# Altium PCB IDC_SMA_Adapter.PCBDOC
Units mm, origin at the board's own origin, x right, y up, seen from the top; angles counter-clockwise.
Board outline 55.81 x 100.04 mm, 4 copper layers (TopLayer, Internal Plane 2, Signal Layer 1, BottomLayer), stack 1.563 mm thick; 71 components, 53 nets, 206 pads, 38 vias.
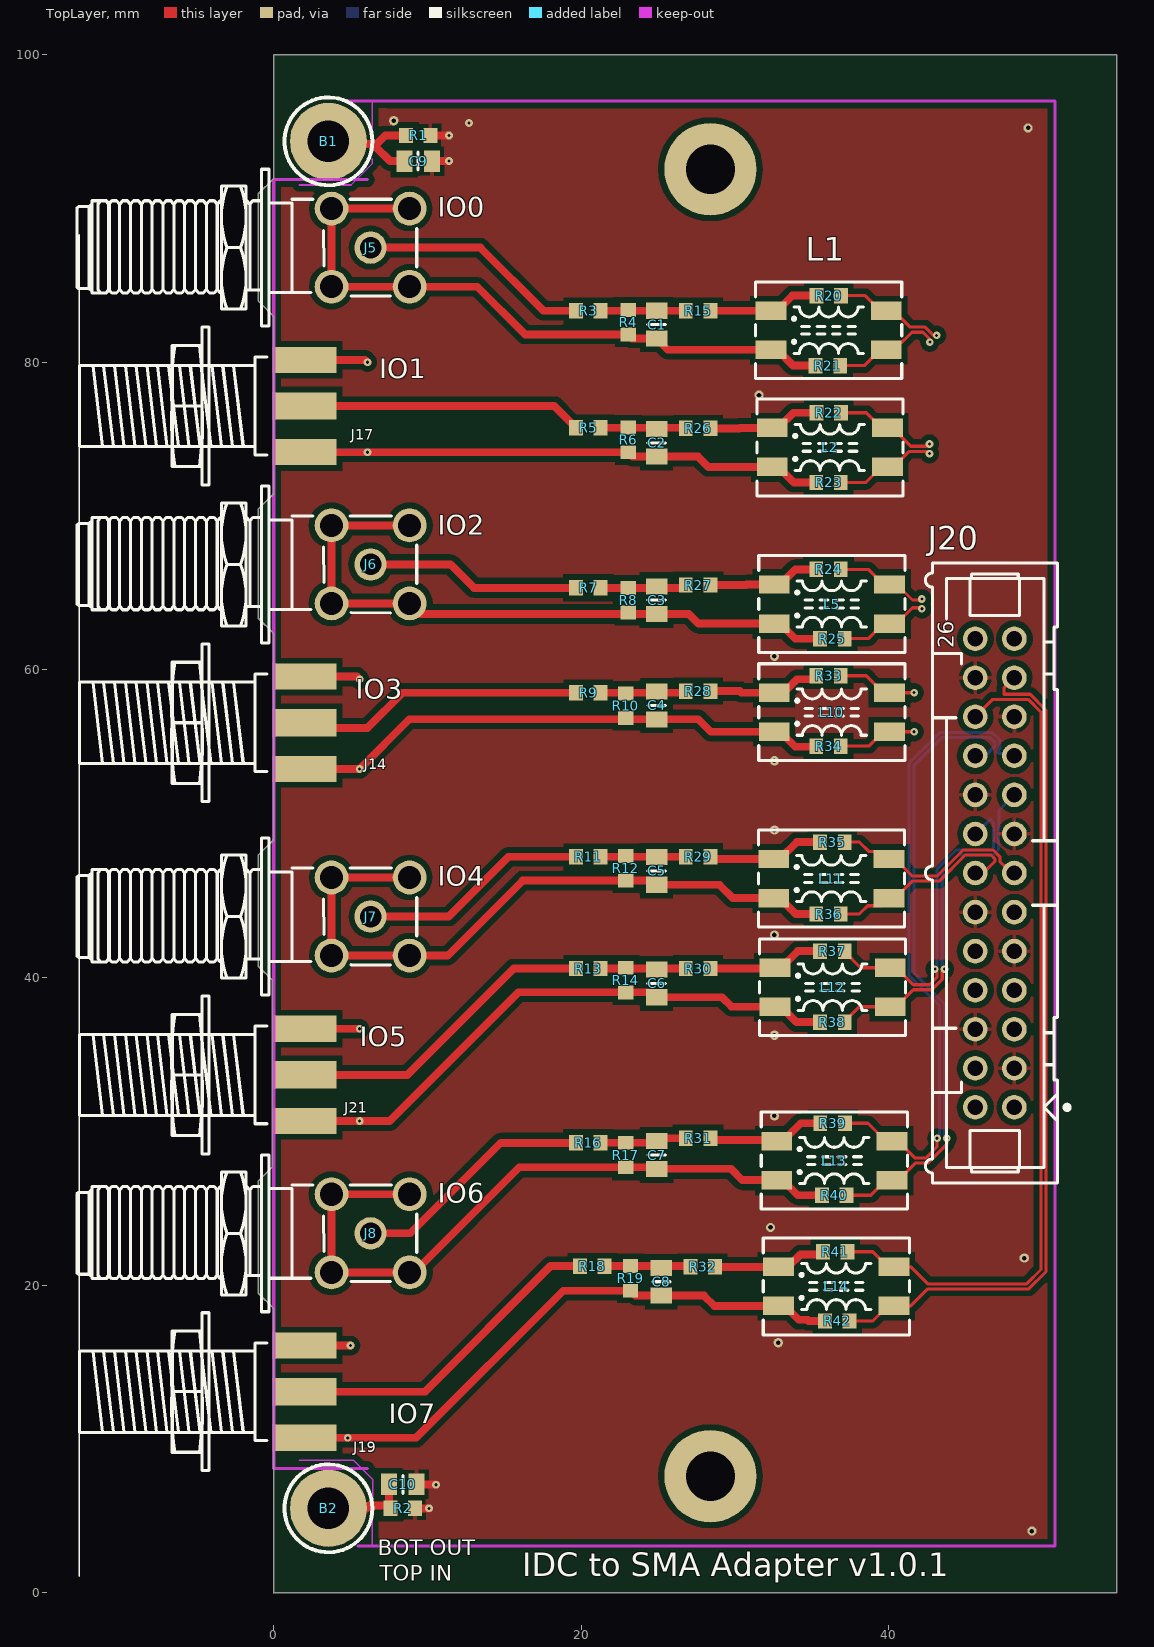
[diagram p0: TopLayer view]
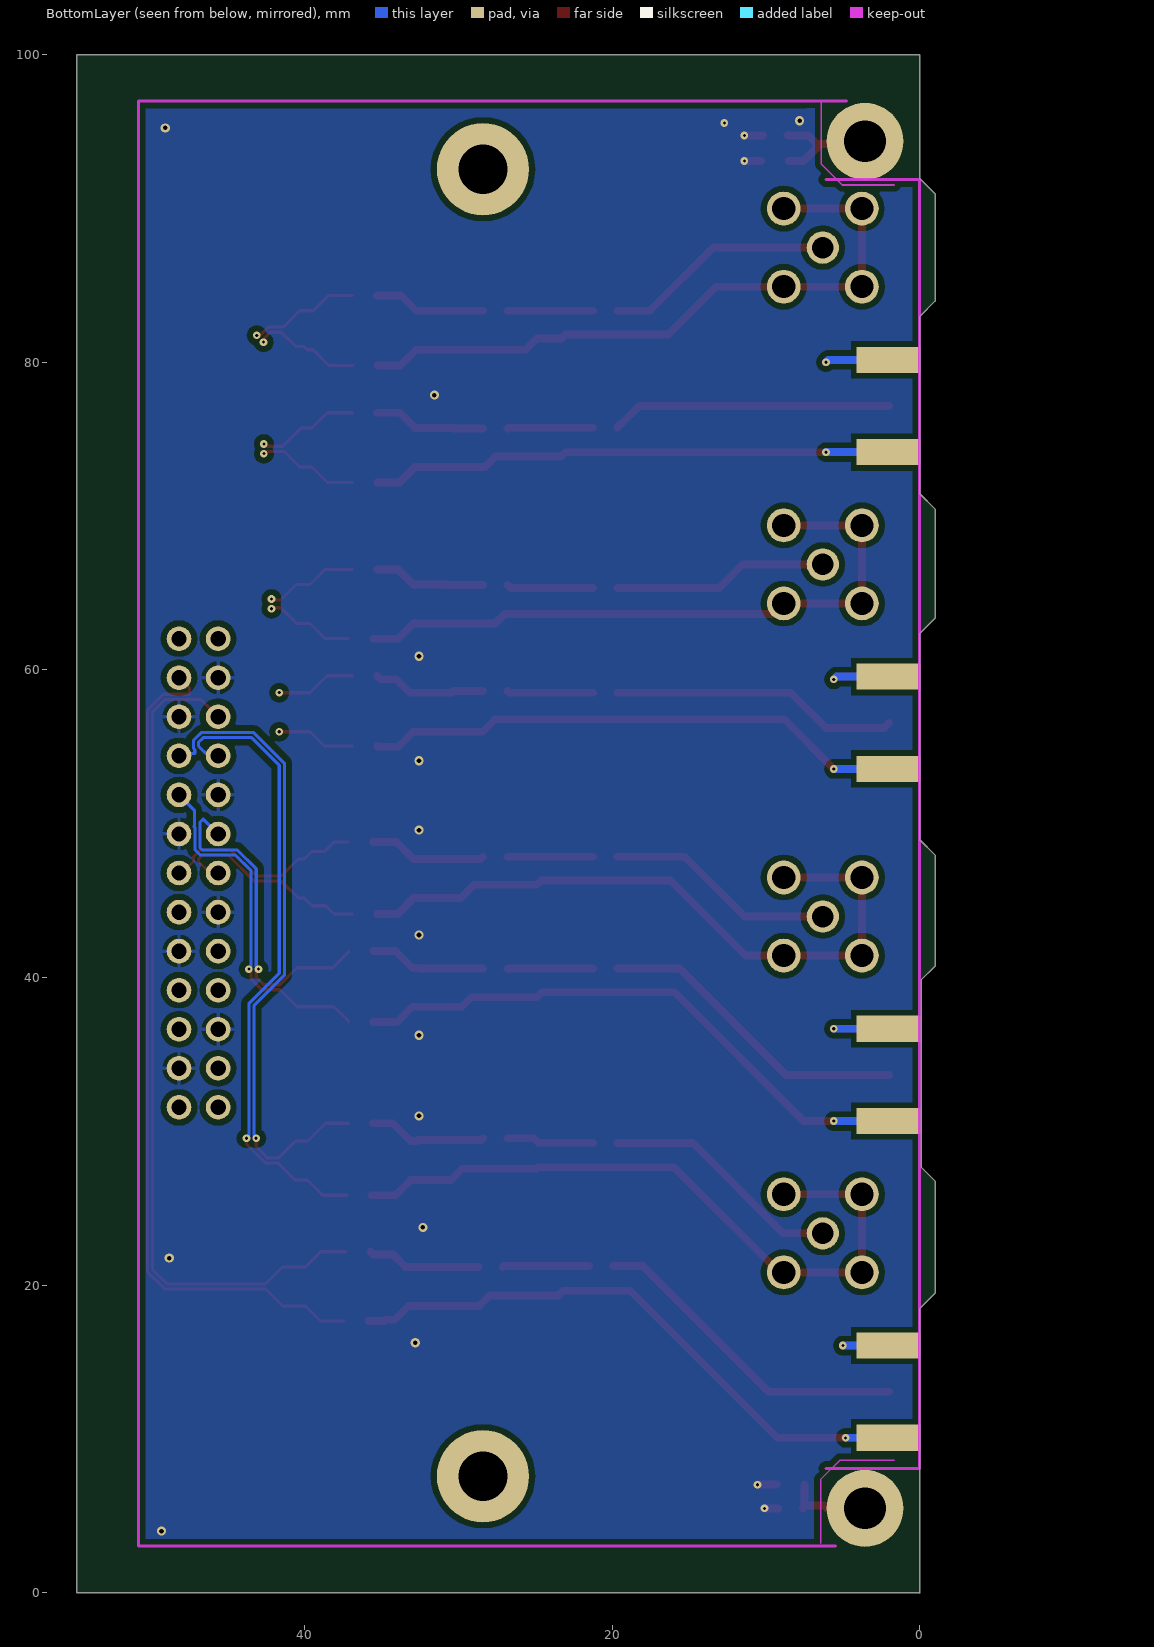
[diagram p1: BottomLayer view, seen from below]
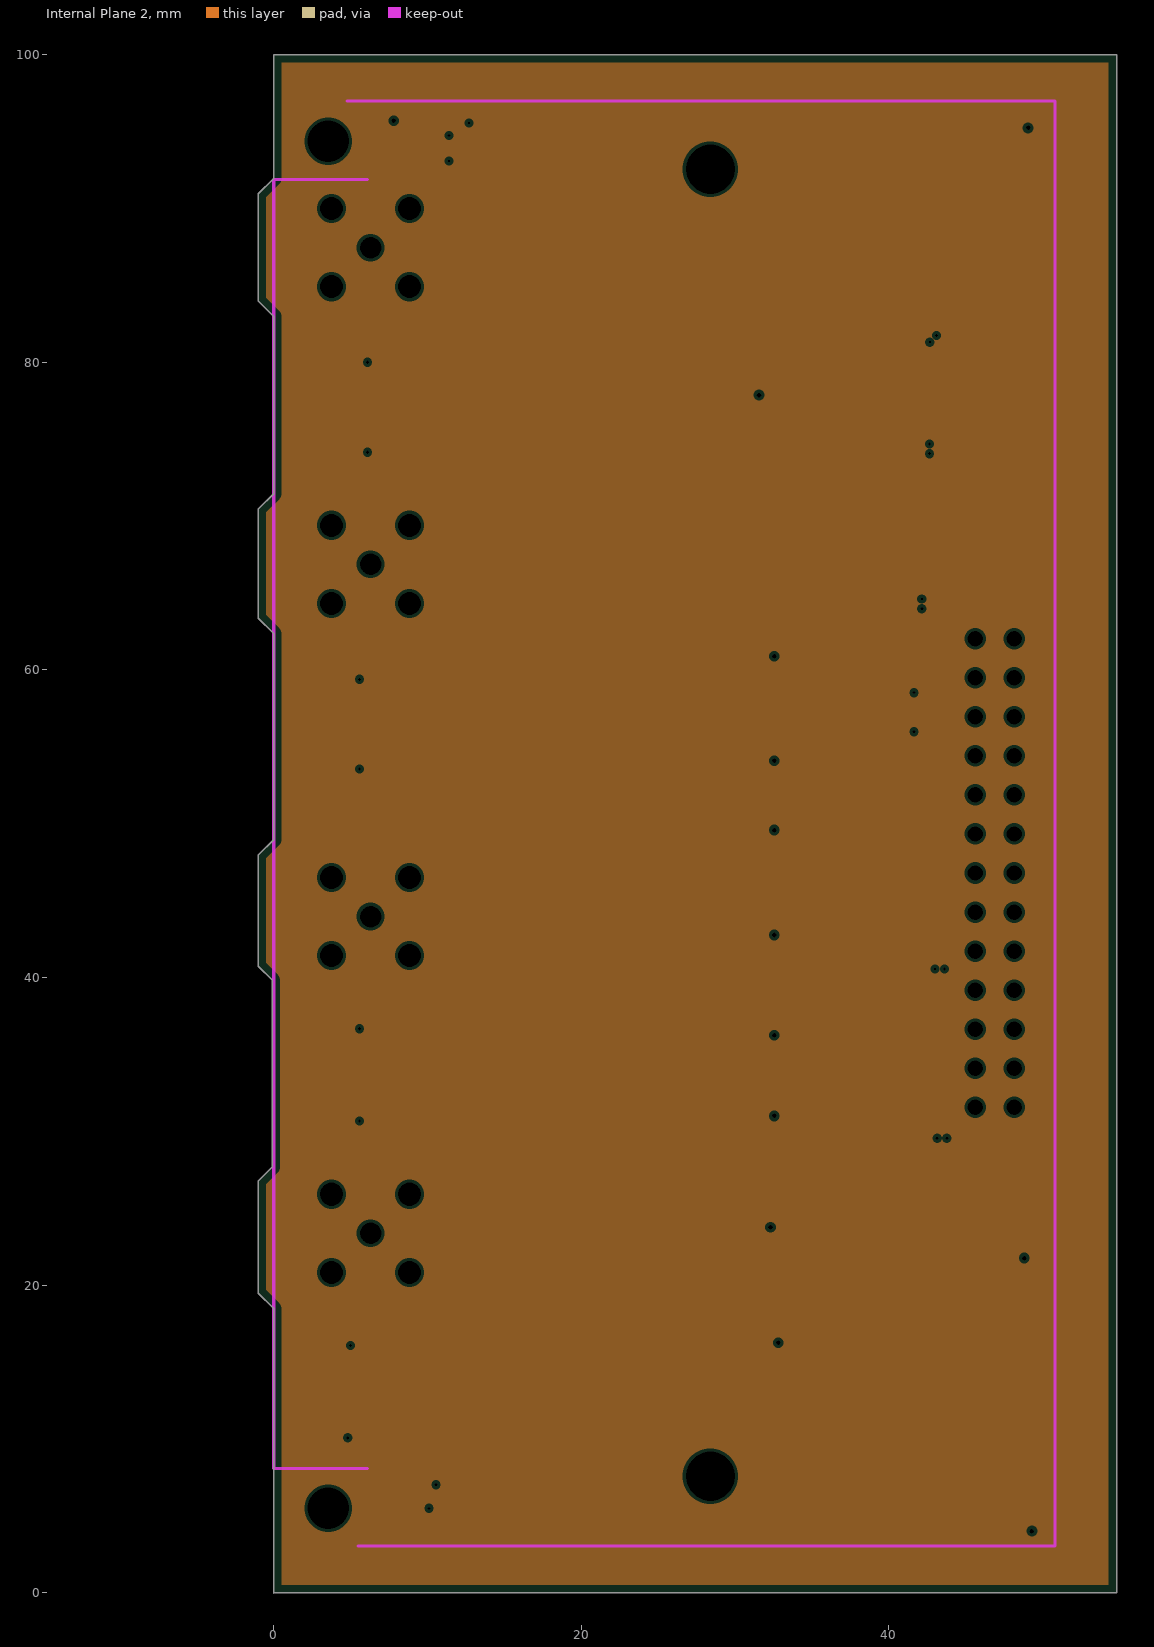
[diagram p2: Internal Plane 2, clearances drawn from the general rule]
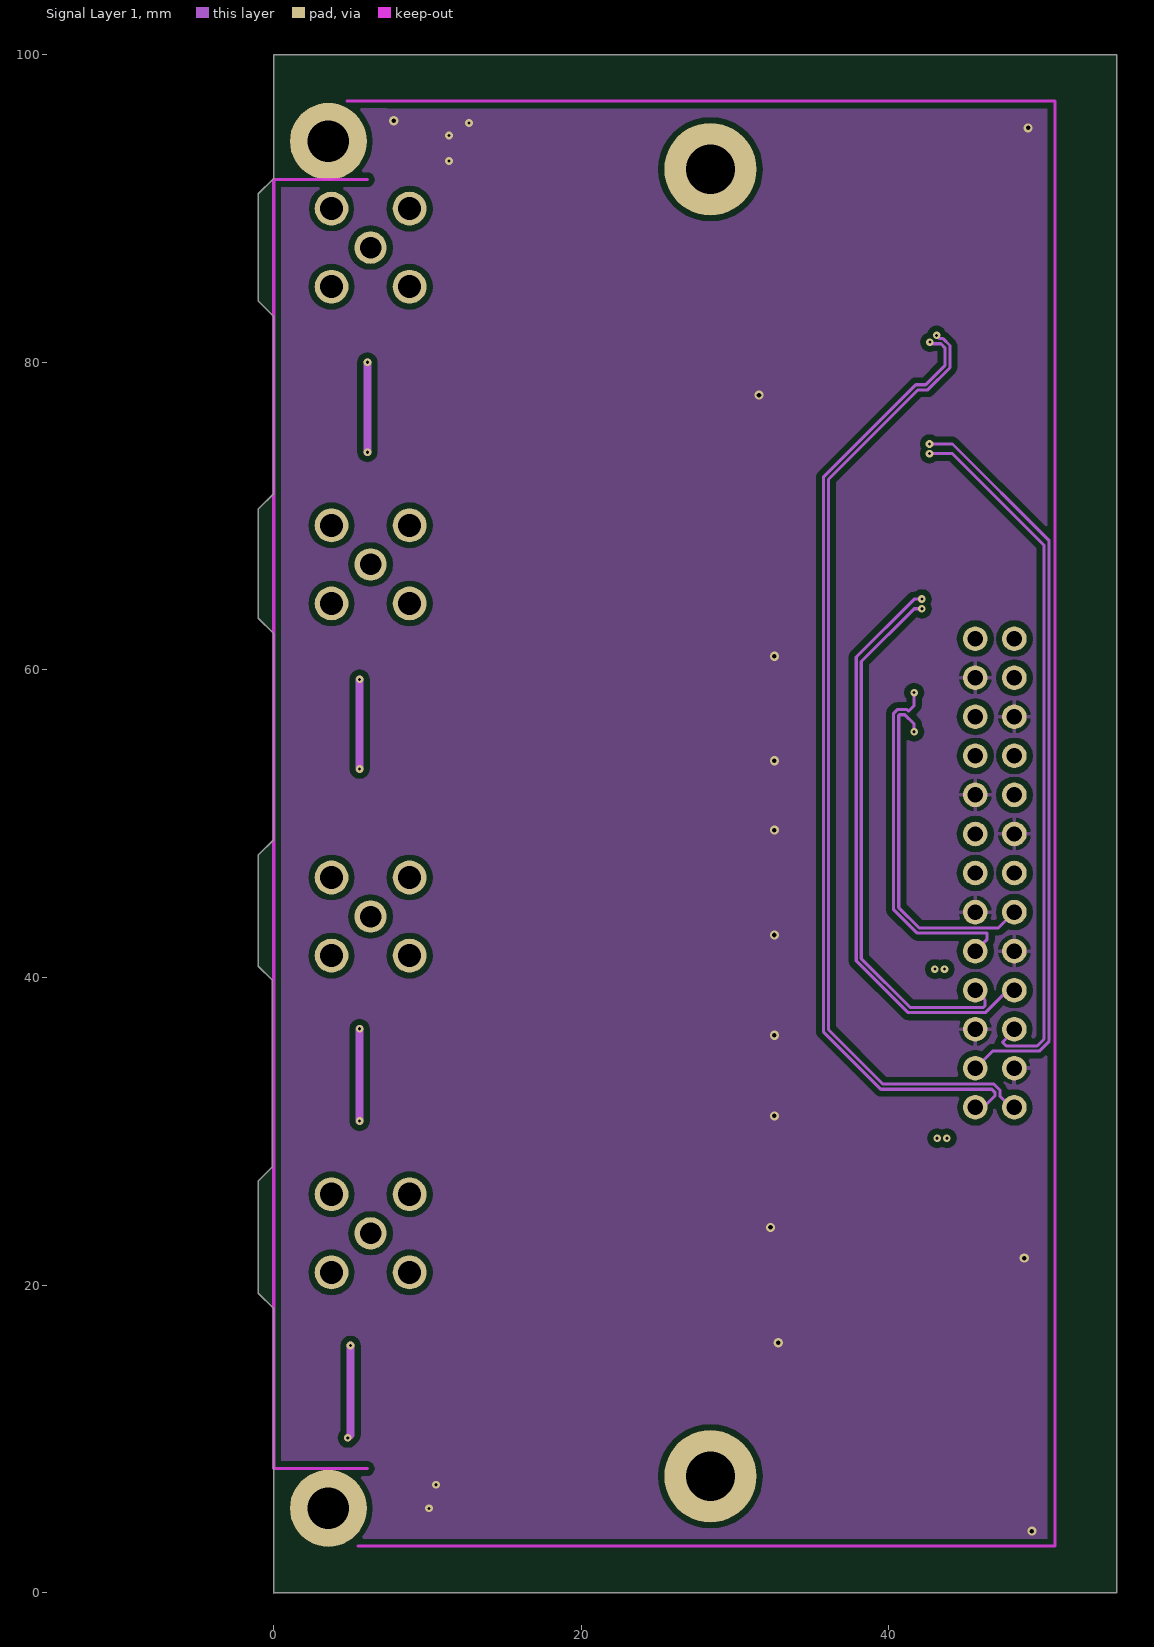
[diagram p3: Signal Layer 1]
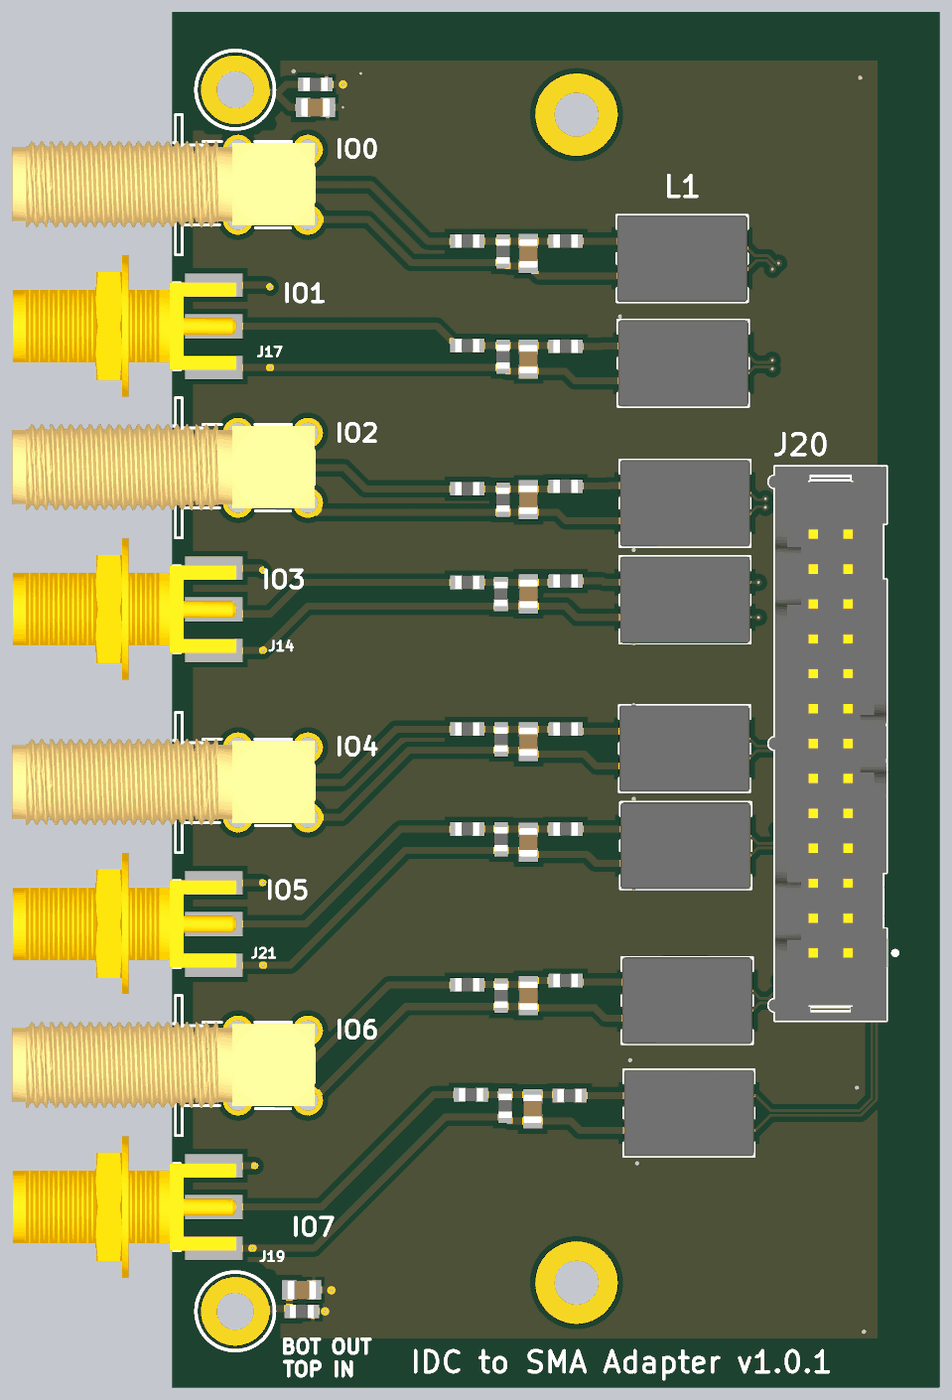
[diagram p4: 3D render of the assembled board from above, using the file's embedded part models]

## Layer stack, top to bottom
TopSolder: solder mask 0.0102, Solder Resist, Dk 3.5
TopLayer: signal copper 0.0356
Dielectric1: core 0.36, FR-4, Dk 4.8
Internal Plane 2: plane copper 0.036
Dielectric 3: prepreg 0.7, Dk 4.2
Signal Layer 1: signal copper 0.036
Dielectric 5: core 0.36, Dk 4.2
BottomLayer: signal copper 0.0356
BottomSolder: solder mask 0.0102, Solder Resist, Dk 3.5

## Board outline
-1,19.464 -1,26.764 -0.095,27.669 -0.095,39.829 -1,40.734 -1,47.964 0,48.964 0,62.364 -1,63.364 -1,70.464 0,71.464 0,82.989 -1,83.989 -1,90.964 0,91.964 0,99.964 0,100 54.809,100 54.809,0 0,0 0,-0.036 0,18.464

## Design rules (kind name [scope] priority, off if disabled: settings)
Clearance Clearance_DIFF [(InDifferentialPairClass('All Differential Pairs')and IsTrack ) vs (InDifferentialPairClass('All Differential Pairs') and IsTrack  )] p1 off: gap=0.508 ignorepadtopadclearanceinfootprint=FALSE except(0: Arc-Hole Track-Hole SMDPad-Hole THPad-Hole Via-Hole Fill-Hole Poly-Hole Region-Hole Text-Hole; 0.127: SMDPad-SMDPad SMDPad-THPad SMDPad-Via SMDPad-Fill SMDPad-Poly SMDPad-Region SMDPad-Text THPad-THPad THPad-Via THPad-Fill THPad-Poly THPad-Region THPad-Text Via-Via Via-Fill Via-Poly Via-Region Via-Text)
Clearance [All] p2: gap=0.127 ignorepadtopadclearanceinfootprint=FALSE except(0: Arc-Hole Track-Hole SMDPad-Hole THPad-Hole Via-Hole Fill-Hole Poly-Hole Region-Hole Text-Hole; 0.381: Arc-Poly Track-Poly SMDPad-Poly THPad-Poly Via-Poly Fill-Poly Poly-Poly)
ComponentClearance [All] p1: gap=0 collisioncheckmode=3 verticalgap=2540 showdistances=FALSE
DiffPairsRouting [All] p1: maxlimit=0.152 minlimit=0.127 mostfreqgap=0.152 toplayer_minwidth=0.127 toplayer_maxwidth=0.152 toplayer_prefwidth=0.152 midlayer1_minwidth=0.127 midlayer1_maxwidth=0.152 midlayer1_prefwidth=0.152 bottomlayer_minwidth=0.127 bottomlayer_maxwidth=0.152 bottomlayer_prefwidth=0.152 maxuncoupledlength=12.7
FabricationTestPointUsage TestPointUsage [All] p1: valid=0 allowmultiple=FALSE
FabricationTestpoint Testpoint [All] p1: side=3 testpointundercomponent=TRUE minsize=1.016 maxsize=2.54 preferedsize=1.524 minholesize=0.508 maxholesize=1.016 preferedholesize=0.813 testpointgrid=0.025 allowsidetop=TRUE allowsidebottom=TRUE usegrid=TRUE gridtolerance=0
Height [All] p1: minheight=0 maxheight=40 prefheight=40
HoleSize [All] p1: absolutevalues=TRUE maxlimit=3.81 minlimit=0.025 maxpercent=80.000 minpercent=20.000
HoleToHoleClearance [All] p1: gap=0.025 allowstackedmicrovias=TRUE
MinimumSolderMaskSliver [All] p1: minsoldermaskwidth=0
PlaneClearance [All] p1: clearance=0.2
PlaneConnect [All] p1: planeconnectstyle=Direct reliefexpansion=0.508 reliefentries=4 reliefconductorwidth=0.254 reliefairgap=0.254
PolygonConnect PolygonConnect_pad [(InPadClass('All Pads'))] p1: connectstyle=Relief reliefconductorwidth=0.254 reliefentries=4 polygonreliefangle="90 Angle" airgapwidth=0.254
PolygonConnect [All] p2: connectstyle=Direct reliefconductorwidth=0.254 reliefentries=4 polygonreliefangle="45 Angle" airgapwidth=0.254
RoomDefinition IDC_SMA_Adapter [InComponentClass('IDC_SMA_Adapter')] p1: confinementstyle=ConfineIn formatcopy=TRUE lockcomponents=FALSE outline 43.809,99.714 41.309,99.714 41.309,83.464 43.809,83.464
RoutingVias [All] p1: holewidth=0.2 width=0.5 viastyle="Through Hole" minholewidth=0.2 minwidth=0.5 maxholewidth=0.711 maxwidth=1.27
SilkToSilkClearance [All] p1: silktosilkclearance=0
SilkToSolderMaskClearance SilkscreenOverComponentPads [IsPad] p1: minsilkscreentomaskgap=0 clearancetoexposedcopper=TRUE
SolderMaskExpansion [All] p1: expansion=0.051 istentingtop=FALSE
ViasUnderSMD [All] p1: allowed=FALSE
Width [All] p1: maxlimit=1.27 minlimit=0.127 preferedwidth=0.127
18 further rules are at their usual default settings.

## Components (designator, comment, footprint, x,y, rotation, side; value= is the part's Value field where it differs from the comment)
B1 "Plated Hole" MTG270_500 3.556,94.376 r0 top
B2 "Plated Hole" MTG270_500 3.556,5.476 r0 top locked
C1 "Undefined" CAPC2012X135N 24.897,82.458 r90 top
C2 "Undefined" CAPC2012X135N 24.897,74.773 r90 top
C3 "Undefined" CAPC2012X135N 24.897,64.537 r90 top
C4 "Undefined" CAPC2012X135N 24.906,57.689 r90 top
C5 "Undefined" CAPC2012X135N 24.897,46.931 r90 top
C6 "Undefined" CAPC2012X135N 24.897,39.615 r90 top
C7 "Undefined" CAPC2012X135N 24.906,28.456 r90 top
C8 "Undefined" CAPC2012X135N 25.206,20.212 r90 top
C9 "Undefined" CAPC2012X135N 9.397,93.095 r0 top
C10 "Undefined" CAPC2012X135N 8.397,7.034 r0 top
J5 "SMA" DELOCK_65848 6.3,87.464 r180 top
J6 "SMA" DELOCK_65848 6.3,66.864 r180 top
J7 "SMA" DELOCK_65848 6.3,43.964 r180 top
J8 "SMA" DELOCK_65848 6.3,23.364 r180 top
J14 "SMA" MOLEX_73251-2120 2,56.564 r0 top locked
J17 "SMA" MOLEX_73251-2120 2,77.164 r0 top locked
J19 "SMA" MOLEX_73251-2120 2,13.064 r0 top locked
J20 "Header 26" 3M_N2526-6003RB 46.897,46.795 r90 top
J21 "SMA" MOLEX_73251-2120 2,33.664 r0 top locked
L1 "2x6.5mH" IND_WURTH_WE-SL2 36.091,82.093 r0 top
L2 "2x6.5mH" IND_WURTH_WE-SL2 36.167,74.473 r0 top
L5 "2x6.5mH" IND_WURTH_WE-SL2 36.294,64.287 r0 top
L10 "2x6.5mH" IND_WURTH_WE-SL2 36.294,57.252 r0 top
L11 "2x6.5mH" IND_WURTH_WE-SL2 36.264,46.435 r0 top
L12 "2x6.5mH" IND_WURTH_WE-SL2 36.345,39.365 r0 top
L13 "2x6.5mH" IND_WURTH_WE-SL2 36.457,28.091 r0 top
L14 "2x6.5mH" IND_WURTH_WE-SL2 36.584,19.912 r0 top
R1 "0" RESC1608X55N 9.397,94.759 r180 top
R2 "0" RESC1608X55N 8.397,5.476 r180 top
R3 "0" RESC1608X55N 20.449,83.363 r0 top
R4 "Undefined" RESC1608X55N 23.047,82.613 r90 top
R5 "0" RESC1608X55N 20.449,75.757 r0 top
R6 "Undefined" RESC1608X55N 23.047,74.957 r90 top
R7 "0" RESC1608X55N 20.449,65.337 r0 top
R8 "Undefined" RESC1608X55N 23.047,64.537 r90 top
R9 "0" RESC1608X55N 20.449,58.522 r0 top
R10 "Undefined" RESC1608X55N 22.897,57.679 r90 top
R11 "0" RESC1608X55N 20.449,47.851 r0 top
R12 "Undefined" RESC1608X55N 22.906,47.101 r90 top
R13 "0" RESC1608X55N 20.449,40.584 r0 top
R14 "Undefined" RESC1608X55N 22.906,39.834 r90 top
R15 "0" RESC1608X55N 27.597,83.363 r0 top
R16 "0" RESC1608X55N 20.449,29.245 r0 top
R17 "Undefined" RESC1608X55N 22.906,28.456 r90 top
R18 "0" RESC1608X55N 20.713,21.232 r0 top
R19 "Undefined" RESC1608X55N 23.206,20.432 r90 top
R20 "0" RESC1608X55N 36.092,84.344 r0 top
R21 "0" RESC1608X55N 36.044,79.795 r0 top
R22 "0" RESC1608X55N 36.092,76.724 r0 top
R23 "0" RESC1608X55N 36.08,72.193 r0 top
R24 "0" RESC1608X55N 36.08,66.538 r0 top
R25 "0" RESC1608X55N 36.334,62.035 r0 top
R26 "0" RESC1608X55N 27.597,75.707 r0 top
R27 "0" RESC1608X55N 27.597,65.522 r0 top
R28 "0" RESC1608X55N 27.597,58.625 r0 top
R29 "0" RESC1608X55N 27.597,47.851 r0 top
R30 "0" RESC1608X55N 27.597,40.584 r0 top
R31 "0" RESC1608X55N 27.597,29.545 r0 top
R32 "0" RESC1608X55N 27.897,21.182 r0 top
R33 "0" RESC1608X55N 36.08,59.622 r0 top
R34 "0" RESC1608X55N 36.08,55.045 r0 top
R35 "0" RESC1608X55N 36.334,48.803 r0 top
R36 "0" RESC1608X55N 36.08,44.128 r0 top
R37 "0" RESC1608X55N 36.334,41.715 r0 top
R38 "0" RESC1608X55N 36.334,37.096 r0 top
R39 "0" RESC1608X55N 36.346,30.523 r0 top
R40 "0" RESC1608X55N 36.457,25.84 r0 top
R41 "0" RESC1608X55N 36.514,22.163 r0 top
R42 "0" RESC1608X55N 36.645,17.661 r0 top

## Footprints (in the part's own frame and the unit in brackets; to place one, negate y for a bottom-side part, rotate by r counter-clockwise, add the part's x,y. Pads: shape width x height; smd on the part's side, far side on the other; paste and mask are expansions set on the pad)
3M_N2526-6003RB [mm] "26 Contacts - Straight .100\" x .100\" Low Profile Four-Wall Header"
  round 1.6 hole 1: 1(-15.24,-1.27) 2(-15.24,1.27) 3(-12.7,-1.27) 4(-12.7,1.27) 5(-10.16,-1.27) 6(-10.16,1.27) 7(-7.62,-1.27) 8(-7.62,1.27) 9(-5.08,-1.27) 10(-5.08,1.27) 11(-2.54,-1.27) 12(-2.54,1.27) 13(0,-1.27) 14(0,1.27) 15(2.54,-1.27) 16(2.54,1.27) 17(5.08,-1.27) 18(5.08,1.27) 19(7.62,-1.27) 20(7.62,1.27) 21(10.16,-1.27) 22(10.16,1.27) 23(12.7,-1.27) 24(12.7,1.27) 25(15.24,-1.27) 26(15.24,1.27)
  silkscreen extent -20.17,-4.85 20.17,4.52, body extent -20.17,-4.11 20.17,4.52, height 9.91
CAPC2012X135N [mm] "Chip Capacitor, Body 2.0x1.25mm, IPC Medium Density"
  rect 1.05x1.4 smd: 1(-0.9,0) 2(0.9,0)
  silkscreen extent 0,-0.58 0,0.58, body extent -1.05,-0.67 1.05,0.68, height 1.25
DELOCK_65848 [mm] "50 Ohm Through Hole SMA Right Angle PCB Jack"
  round 2.1 hole 1.4: 1(0,0)
  round 2.2 hole 1.5: 2(-2.54,2.54) 2(-2.54,-2.54) 2(2.54,2.54) 2(2.54,-2.54)
  silkscreen extent -3,-5.1 19.1,5.1, body extent -3.04,-3.17 18.96,3.09, height 9.15
IND_WURTH_WE-SL2 [mm] "Common Mode SMD Line Filter WE-SL2"
  rect 2x1.2 smd: 1(-3.75,1.27) 2(-3.75,-1.27) 3(3.75,-1.27) 4(3.75,1.27)
  silkscreen extent -4.75,-3.15 4.75,3.15, body extent -4.75,-3.15 4.75,3.15, height 5.3
MOLEX_73251-2120 [mm] "50 Ohm, SMA Edge Mount PCB, With Jam Nut And Lock Washer"
  rect 4.19x1.78 smd: 1(0,0)
  rect 4.19x1.7 smd: 2(0,-3) 2(0,3)
  rect 4.19x1.7 smd far side: 2(0,-3) 2(0,3)
  silkscreen extent -14.64,-5.13 -2.44,5.13, body extent -14.64,-5.13 1.62,5.13, height 5.76
MTG270_500 [mm] "Plated Through Hole: Hole Dia.=2.7mm Pad Dia.=5.0mm"
  round 5 hole 2.7: 1(0,0)
RESC1608X55N [mm] "Chip Resistor, EIA 0603, Metric 1608, Body 1.6x0.8mm, IPC Medium Density"
  rect 0.9x1 smd: 1(-0.8,0) 2(0.8,0)
  body extent -0.87,-0.47 0.88,0.48, height 0.55

## Part data
B1 B2: library part PLATED_HOLE2.7_PAD5.0, "Single Terminal Socket", Author="CERN DEM JMW", ComponentHeight=0mm, Component Type="Standard (No BOM)", CreateDate=27.09.2011, Family="Plated Hole", HelpURL=Undefined, LatestRevisionDate=27.09.2011, Mounted=No, PackageDescription="Plated Through Hole: Hole Dia.=2.7mm Pad Dia.=5.0mm", Part Description="Plated Through Hole: Hole Dia.=2.7mm Pad Dia.=5.0mm", Part Number=PLATED_HOLE2.7_PAD5.0, Pin Count=1, Sense=No, SMD=No, Socket=No, Status=None
C1 C2 C3 C4 C5 C6 C7 C8 C9 C10: library part CC0805_NO-VALUE, "Non-polarised capacitor", Case=0805, Manufacturer1 ComponentHeight=1.35mm, Author="CERN DEM JLC", Component Type=Standard, CreateDate=10.12.2008, HelpURL=Undefined, LatestRevisionDate=11.09.2013, Manufacturer=Undefined, Manufacturer Part Number=CC0805_NO-VALUE, Mounted=No, Part Description="Reserved Footprint For 0805(2012) Chip Ceramic Capacitor", Part Number=CC0805_NO-VALUE, Pin Count=2, Sense=No, SMD=Yes, Socket=No, Status=None
J5 J6 J7 J8: library part CON_SMA_DELOCK_65848, "50 Ohm Through Hole SMA Right Angle PCB Jack", Manufacturer=DELOCK, Manufacturer Part Number="5848 (4043619658480)", Part Number=DELOCK_65848, Author=GK, Component Type=Standard, ComponentHeight=12.5, CreateDate=13.05.2019, Family=SMA, HelpURL=\\cern.ch\dfs\Applications\Altium\Datasheets\AMPHENOL_132203-16.pdf, LatestRevisionDate=13.05.2019, Mounted=Yes, Part Description="50 Ohm Through Hole SMA Right Angle PCB Jack", Pin Count=5, PressFit=No, Sense=No, SMD=No, Socket=No, Status=None
J14 J17 J19 J21: library part CON_SMA_RA_SMD_73251-2120, "50 Ohm, SMA Edge Mount PCB, With Jam Nut And Lock Washer", Manufacturer=MOLEX, Manufacturer Part Number=73251-2120, Part Number=MOLEX_73251-2120, Author="CERN DEM JLC", ComponentHeight=5.75mm, Component Type=Standard, CreateDate=26.10.2016, Family=SMA, HelpURL=\\cern.ch\dfs\Applications\Altium\Datasheets\MOLEX_73251-2121.pdf, LatestRevisionDate=26.10.2016, Mounted=Yes, Part Description="50 Ohm, SMA Edge Mount PCB, With Jam Nut And Lock Washer", Pin Count=5, PressFit=No, Sense=No, SMD=Yes, Socket=No, Status=None
J20: library part 3M_N2526-6003RB, "Connector 26 Male", Manufacturer=3M, Manufacturer Part Number=N2526-6003RB, Author="CERN DEM JLC", ComponentHeight=9.91mm, Component Type=Standard, CreateDate=22.01.2014, Family="Header 26", HelpURL=\\cern.ch\dfs\Applications\Altium\Datasheets\3M_N2526-6003RB.pdf, LatestRevisionDate=22.01.2014, Mounted=Yes, Part Description="26 Contacts - Straight .100'' x .100'' Low Profile Four-Wall Header, 2500 Series", Part Number=3M_N2526-6003RB, Pin Count=26, PressFit=No, Sense=No, SMD=No, Socket=No, Status=None
L1 L2 L5 L10 L11 L12 L13 L14: library part IND_6.5MH_50%_WURTH_WE-SL2-744229, "Inductor Common Mode", Manufacturer="WURTH ELEKTRONIK", Manufacturer Part Number=744229, Power=400mA, Resistance=0.95R, Tolerance=±50%, Author="CERN DEM JLC", ComponentHeight=5.3mm, Component Type=Standard, CreateDate=01.10.2012, HelpURL=\\cern.ch\dfs\Applications\Altium\Datasheets\IND_WURTH_WE-SL2_744229.pdf, LatestRevisionDate=15.10.2012, Mounted=Yes, Part Description="Common Mode SMD Line Filter (WE-SL2 Serie)", Part Number=IND_6.5MH_50%_WURTH_WE-SL2-744229, Pin Count=4, Sense=No, SMD=Yes, Socket=No, Status=None
R1 R2 R3 R5 R7 R9 R11 R13 R15 R16 R18 R20 R21 R22 R23 R24 R25 R26 R27 R28 R29 R30 R31 R32 R33 R34 R35 R36 R37 R38 R39 R40 R41 R42: library part R0603_0R_JUMPER, "Resistor", Case=0603, Manufacturer=GENERIC, Manufacturer1 ComponentHeight=0.55mm, Manufacturer1 Example="NIC COMPONENT", Manufacturer1 Part Number=NRC06Z0, Author="CERN DEM JLC", Component Type=Standard, CreateDate=03.12.2007, HelpURL=\\cern.ch\dfs\Applications\Altium\Datasheets\R0603_NIC_NRC.pdf, LatestRevisionDate=13.03.2008, Manufacturer Part Number=R0603_0R_JUMPER, Mounted=Yes, Part Description="1A (0.05R Max DC Resistance) Zero Ohm Jumper", Part Number=R0603_0R_JUMPER, Pin Count=2, Sense=No, SMD=Yes, Socket=No, Status=Preferred
  R1 R2: PressFit=No
R4 R6 R8 R10 R12 R14 R17 R19: library part R0603_NO-VALUE, "Resistor", Case=0603, Author="CERN DEM JLC", Component Type=Standard, CreateDate=03.12.2007, HelpURL=Undefined, LatestRevisionDate=13.03.2008, Manufacturer=Undefined, Manufacturer1 ComponentHeight=Undefined, Manufacturer1 Example=Undefined, Manufacturer1 Part Number=Undefined, Manufacturer Part Number=R0603_NO-VALUE, Mounted=No, Part Description="Reserved Footprint For a 0603 (1608) Chip Resistor", Part Number=R0603_NO-VALUE, Pin Count=2, PressFit=No, Sense=No, SMD=Yes, Socket=No, Status=None

## Free pads (board coordinates)
  round 6 hole 3.2: 2(28.4,92.564) 3(28.4,7.564)

## Via types
v1: diameter 0.5, hole 0.2, TopLayer to BottomLayer, tented both sides, 14 vias
v2: diameter 0.6, hole 0.3, TopLayer to BottomLayer, tented both sides, 13 vias
v3: diameter 0.5, hole 0.2, TopLayer to BottomLayer, 11 vias

## Nets (pads, with @x,y where several pads share a name; then routed paths per layer and width w, separated by ;. In a path a pad name is that pad's centre, name@x,y a point inside that pad or via, vN(x,y) a via of type N, cw(c..) or ccw(c..) an arc to the next point about the centre after c; other vN are vias at no path point)
CH0: J5.1 R3.1 | length 15
  TopLayer w0.508: J5.1 13.442,87.464 17.544,83.363 R3.1
CH1: J17.1 R5.1 | length 18.3
  TopLayer w0.508: J17.1 18.241,77.164 19.403,76.003 19.453,76.003 19.649,75.807 R5.1
CH2: J6.1 R7.1 | length 14.1
  TopLayer w0.508: J6.1@6.189,66.864 11.496,66.864 13.022,65.337 R7.1
CH3: J14.1 R9.1 | length 18.7
  TopLayer w0.508: J14.1 2.33,56.234 6.096,56.234 8.383,58.522 R9.1
CH4: J7.1 R11.1 | length 15
  TopLayer w0.508: J7.1 11.383,43.964 15.27,47.851 R11.1
CH5: J21.1 R13.1 | length 20.5
  TopLayer w0.508: J21.1 8.689,33.664 15.609,40.584 R13.1
CH6: J8.1 R16.1 | length 15.8
  TopLayer w0.508: J8.1@6.3,23.364 8.885,23.364 14.765,29.245 R16.1
CH7: J19.1 R18.1 | length 21.3
  TopLayer w0.508: J19.1 9.834,13.064 18.002,21.232 R18.1
GND: C9.2 C10.2 J20.3 J20.6 J20.9 J20.12 J20.15 J20.18 J20.21 J20.24 R1.1 R2.1 | length 4.5
  TopLayer w0.508: R2.1 v3(10.097,5.476) ; C10.2 10.528,7.034 v3(10.552,7.009) ; R1.1 v3(11.4,94.759) ; C9.2 v1(11.4,93.095)
  other v1: 12.7,95.57
  other v2: 49.309,4 32.809,16.25 48.809,21.75 32.309,23.75 32.559,31 32.559,36.25 32.559,42.765 32.559,49.585 32.559,54.102 32.559,60.887 31.559,77.873 49.059,95.25 7.809,95.714
IDC_N0: J20.2 L1.3 R21.2 | length 71
  TopLayer w0.203: R21.2 38.413,79.795 39.441,80.823 L1.3 40.063,81.045 40.591,81.045 41.511,81.965 42.228,81.965 42.667,81.525 v1(42.667,81.315)
  Signal Layer 1 w0.203: v1(42.667,81.315) 42.768,81.215 43.397,81.215 43.647,80.965 43.647,79.795 42.397,78.545 41.761,78.545 35.75,72.534 35.75,36.476 39.489,32.736 46.706,32.736 46.897,32.545 46.897,32.295 46.157,31.555 J20.2
IDC_N1: J20.5 L2.3 R23.2 | length 52.9
  TopLayer w0.203: R23.2 38.508,72.193 39.517,73.203 L2.3 40.325,73.203 41.337,74.215 42.499,74.215 v1(42.647,74.066)
  Signal Layer 1 w0.203: v1(42.647,74.066) 44.147,74.066 50.098,68.116 50.098,35.995 49.647,35.545 47.647,35.545 47.397,35.795 48.167,36.565 J20.5
IDC_N2: J20.8 L5.3 R25.2 | length 41.2
  TopLayer w0.203: R25.2 38.662,62.035 39.644,63.017 L5.3 40.517,63.017 41.544,64.045 42.084,64.045 v1(42.147,63.981)
  Signal Layer 1 w0.203: v1(42.147,63.981) 41.647,63.981 38.213,60.547 38.213,41.229 41.397,38.045 46.147,38.045 46.257,38.155 46.257,38.545 J20.8
IDC_N3: J20.11 L10.3 R34.2 | length 27.9
  TopLayer w0.203: R34.2 38.708,55.045 39.644,55.982 L10.3 v1(41.647,55.982)
  Signal Layer 1 w0.203: v1(41.647,55.982) 41.647,56.484 41.044,57.087 40.689,57.087 40.647,57.045 40.647,44.545 41.966,43.226 47.139,43.226 J20.11
IDC_N4: J20.14 L11.3 R36.2 | length 13.5
  TopLayer w0.203: R36.2 38.086,44.128 38.625,44.667 39.515,44.667 L11.3 40.414,45.165 41.518,46.27 43.284,46.27 44.979,47.965 46.647,47.965 46.897,47.715 46.897,47.545 46.147,46.795 J20.14
IDC_N5: J20.17 L12.3 R38.2 | length 22.9
  TopLayer w0.203: R38.2 37.134,37.146 38.084,38.095 L12.3 40.495,38.095 41.6,39.2 42.784,39.2 43.478,39.894 43.478,40.396 v1(43.626,40.545)
  BottomLayer w0.203: v1(43.626,40.545) 43.478,40.693 43.478,46.931 44.512,47.965 46.784,47.965 47.139,48.319 47.139,49.761 47.2,49.822 47.169,49.853 47.169,50.877 J20.17
IDC_N6: J20.20 L13.3 R40.2 | length 41.3
  TopLayer w0.203: R40.2 38.826,25.84 39.807,26.821 L13.3 40.607,26.821 41.712,27.926 42.534,27.926 43.774,29.166 v1(43.774,29.545)
  BottomLayer w0.203: v1(43.774,29.545) 43.626,29.693 43.626,38.295 41.647,40.274 41.647,53.795 43.449,55.596 46.596,55.596 46.897,55.295 46.897,55.045 46.267,54.415 J20.20
IDC_N7: J20.23 L14.3 R42.2 | length 55.2
  TopLayer w0.203: R42.2 38.967,17.661 39.948,18.642 L14.3 41.436,18.642 42.541,19.747 49.102,19.747 50.228,20.872 50.228,57.388 49.196,58.42 47.484,58.42 47.484,58.812 J20.23
IDC_P0: J20.1 L1.4 R20.2 | length 71
  TopLayer w0.203: R20.2 38.46,84.344 39.441,83.363 L1.4 40.329,83.363 41.397,82.295 42.364,82.295 42.901,81.758 v1(43.111,81.758)
  Signal Layer 1 w0.203: v1(43.111,81.758) 43.324,81.545 43.534,81.545 43.978,81.101 43.978,79.658 42.534,78.215 41.897,78.215 36.08,72.397 36.08,36.612 39.626,33.066 46.843,33.066 47.228,32.682 47.228,32.295 47.968,31.555 J20.1
IDC_P1: J20.4 L2.4 R22.2 | length 55.2
  TopLayer w0.203: R22.2 38.536,76.724 39.517,75.743 L2.4 40.219,75.743 41.417,74.545 42.499,74.545 v1(42.647,74.693)
  Signal Layer 1 w0.203: v1(42.647,74.693) 44.147,74.693 50.428,68.413 50.428,35.858 49.784,35.215 46.747,35.215 J20.4
IDC_P2: J20.7 L5.4 R24.2 | length 44
  TopLayer w0.203: R24.2 38.663,66.538 39.644,65.557 L5.4 40.532,65.557 41.544,64.545 42.084,64.545 v1(42.147,64.608)
  Signal Layer 1 w0.203: v1(42.147,64.608) 41.647,64.608 37.883,60.844 37.883,41.092 41.261,37.715 46.284,37.715 47.744,39.175 J20.7
IDC_P3: J20.10 L10.4 R33.2 | length 28.7
  TopLayer w0.203: R33.2 38.544,59.622 39.644,58.522 L10.4 v1(41.647,58.522)
  Signal Layer 1 w0.203: v1(41.647,58.522) 41.647,57.689 41.278,57.32 41.181,57.417 40.552,57.417 40.456,57.32 40.414,57.278 40.317,57.182 40.317,44.408 41.761,42.965 41.829,42.896 46.397,42.896 46.397,42.485 J20.10
IDC_P4: J20.13 L11.4 R35.2 | length 13.4
  TopLayer w0.203: R35.2 38.096,48.803 38.696,48.204 39.515,48.204 L11.4 40.414,47.705 41.518,46.6 43.147,46.6 44.842,48.295 46.784,48.295 47.228,47.851 47.228,47.545 47.978,46.795 J20.13
IDC_P5: J20.16 L12.4 R37.2 | length 21.8
  TopLayer w0.203: R37.2 37.134,41.665 38.164,40.635 L12.4 40.495,40.635 41.6,39.53 42.647,39.53 43.147,40.03 43.147,40.396 v1(42.999,40.545)
  BottomLayer w0.203: v1(42.999,40.545) 43.147,40.693 43.147,47.067 44.375,48.295 46.647,48.295 46.808,48.456 46.808,50.076 46.589,50.295 45.629,49.335 J20.16
IDC_P6: J20.19 L13.4 R39.2 | length 42
  TopLayer w0.203: R39.2 38.645,30.523 39.807,29.361 L13.4 40.607,29.361 41.712,28.256 42.397,28.256 43.147,29.006 v1(43.147,29.545)
  BottomLayer w0.203: v1(43.147,29.545) 43.296,29.693 43.296,38.158 41.317,40.137 41.317,53.932 43.312,55.926 46.733,55.926 47.131,55.528 47.228,55.432 47.228,54.908 47.131,54.811 47.147,54.795 47.147,54.561 48.021,54.561 J20.19
IDC_P7: J20.22 L14.4 R41.2 | length 55.2
  TopLayer w0.203: R41.2 38.953,22.163 39.934,21.182 L14.4 41.436,21.182 42.541,20.077 48.965,20.077 49.897,21.009 49.897,57.252 49.059,58.09 46.762,58.09 J20.22
N13V0_SCSI: J20.26
NetB1_1: B1.1 C9.1 R1.2 | length 7.5
  TopLayer w0.508: B1.1@3.702,94.23 4.209,94.23 4.235,94.204 6.216,94.204 6.219,94.201 6.699,94.201 7.257,94.759 R1.2 ; 6.576,94.078 7.559,93.095 C9.1
NetB2_1: B2.1 C10.1 R2.2 | length 3.1
  TopLayer w0.508: B2.1@6.029,5.476 6.219,5.665 7.408,5.665 R2.2 ; R2.2@7.497,5.665 C10.1@7.497,7.009
NetC1_1: C1.1 J5.2 L1.2 R4.1 R21.1 | length 43.8
  TopLayer w0.508: J5.2@3.757,84.927 J5.2@3.757,90.004 ; J5.2@3.76,84.924 13.241,84.924 16.352,81.813 R4.1 23.302,81.558 C1.1 25.632,80.823 L1.2 32.741,80.823 33.769,79.795 R21.1 ; J5.2@3.76,90.004 J5.2@8.84,90.004
NetC1_2: C1.2 R3.2 R4.2 R15.1 | length 5.5
  TopLayer w0.508: R3.2 R15.1
NetC2_1: C2.1 J17.2 L2.2 R6.1 R23.1 | length 52.4
  TopLayer w0.508: J17.2@2,74.164 2.007,74.157 v3(6.096,74.157) R6.1 23.331,73.873 C2.1 27.597,73.873 28.267,73.203 L2.2 32.817,73.203 33.827,72.193 R23.1 ; J17.2@2,80.164 5.941,80.164 v3(6.096,80.009)
  Signal Layer 1 w0.508: v3(6.096,74.157) v3(6.096,80.009)
  BottomLayer w0.508: J17.2@2,74.164 6.089,74.164 v3(6.096,74.157) ; J17.2@2,80.164 5.941,80.164 v3(6.096,80.009)
NetC2_2: C2.2 R5.2 R6.2 R26.1 | length 5.6
  TopLayer w0.508: R5.2 R6.2 26.747,75.757 R26.1
NetC3_1: C3.1 J6.2 L5.2 R8.1 R25.1 | length 42.9
  TopLayer w0.508: J6.2@8.84,69.404 3.76,69.404 3.76,64.324 8.153,64.324 8.84,63.637 23.047,63.637 C3.1 26.993,63.637 27.613,63.017 L5.2 32.944,63.017 33.927,62.035 R25.1
NetC3_2: C3.2 R7.2 R8.2 R27.1 | length 5.6
  TopLayer w0.508: R7.2 R8.2 26.613,65.337 R27.1
NetC4_1: C4.1 J14.2 L10.2 R10.1 R34.1 | length 52.1
  TopLayer w0.508: J14.2@2,53.564 v3(5.588,53.564) 8.813,56.789 C4.1 27.61,56.789 28.417,55.982 L10.2 32.944,55.982 33.916,55.01 35.245,55.01 R34.1 ; J14.2@2,59.564 5.413,59.564 v3(5.588,59.389)
  Signal Layer 1 w0.508: v3(5.588,53.564) v3(5.588,59.389)
  BottomLayer w0.508: J14.2@2,53.564 v3(5.588,53.564) ; J14.2@2,59.564 5.413,59.564 v3(5.588,59.389)
NetC4_2: C4.2 R9.2 R10.2 R28.1 | length 5.6
  TopLayer w0.508: R9.2 26.694,58.522 R28.1
NetC5_1: C5.1 J7.2 L11.2 R12.1 R36.1 | length 44.4
  TopLayer w0.508: J7.2@8.689,46.504 3.76,46.504 3.76,41.424 5.84,41.424 11.312,41.424 16.19,46.301 R12.1 24.626,46.301 C5.1 28.983,46.031 29.848,45.165 L11.2 32.914,45.165 33.951,44.128 R36.1
NetC5_2: C5.2 R11.2 R12.2 R29.1 | length 5.5
  TopLayer w0.508: R11.2 R29.1
NetC6_1: C6.1 J21.2 L12.2 R14.1 R38.1 | length 54.6
  TopLayer w0.508: J21.2@2,30.664 v3(5.588,30.664) 7.552,30.664 15.923,39.034 R14.1 24.578,39.034 C6.1 29.158,38.715 29.778,38.095 L12.2 32.995,38.095 33.995,37.096 R38.1 ; J21.2@2,36.664 v3(5.588,36.664)
  Signal Layer 1 w0.508: v3(5.588,30.664) v3(5.588,36.664)
  BottomLayer w0.508: J21.2@2,30.664 v3(5.588,30.664) ; J21.2@2,36.664 v3(5.588,36.664)
NetC6_2: C6.2 R13.2 R14.2 R30.1 | length 5.5
  TopLayer w0.508: R13.2 R30.1
NetC7_1: C7.1 J8.2 L13.2 R17.1 R40.1 | length 45.3
  TopLayer w0.508: J8.2@8.457,20.824 3.76,20.824 3.76,25.904 J8.2@8.84,25.904 ; J8.2@8.84,20.824 9.14,20.824 15.972,27.656 R17.1 24.806,27.656 C7.1 29.741,27.556 30.476,26.821 L13.2 33.107,26.821 34.088,25.84 R40.1
NetC7_2: C7.2 R16.2 R17.2 R31.1 | length 5.7
  TopLayer w0.508: R16.2 21.26,29.256 R17.2 24.806,29.256 C7.2 25.095,29.545 R31.1
NetC8_1: C8.1 J19.2 L14.2 R19.1 R42.1 | length 53.5
  TopLayer w0.508: J19.2@2,10.064 v3(4.814,10.064) 9.256,10.064 18.824,19.632 R19.1 23.526,19.312 C8.1 27.976,19.312 28.646,18.642 L14.2 33.234,18.642 34.139,17.737 34.707,17.737 34.783,17.661 R42.1 ; J19.2@2,16.064 v3(5,16.064)
  Signal Layer 1 w0.508: v3(4.814,10.064) 5,10.25 v3(5,16.064)
  BottomLayer w0.508: J19.2@2,10.064 v3(4.814,10.064) ; J19.2@2,16.064 v3(5,16.064)
NetC8_2: C8.2 R18.2 R19.2 R32.1 | length 5.6
  TopLayer w0.508: R18.2 R19.2 27.047,21.232 R32.1
NetL1_1: L1.1 R15.2 R20.1 | length 7.3
  TopLayer w0.508: R15.2 L1.1 32.741,83.363 33.722,84.344 R20.1
NetL2_1: L2.1 R22.1 R26.2 | length 7.3
  TopLayer w0.508: R26.2 30.277,75.707 30.313,75.743 L2.1 32.817,75.743 33.798,76.724 R22.1
NetL5_1: L5.1 R24.1 R27.2 | length 7.3
  TopLayer w0.508: R27.2 30.706,65.522 30.741,65.557 L5.1 32.944,65.557 33.925,66.538 R24.1
NetL10_1: L10.1 R28.2 R33.1 | length 7.4
  TopLayer w0.508: R28.2 30.311,58.625 30.414,58.522 L10.1 33.162,58.522 34.034,59.394 35.084,59.394 35.28,59.59 R33.1
NetL11_1: L11.1 R29.2 R35.1 | length 7.7
  TopLayer w0.508: R29.2 28.544,47.705 L11.1 32.914,47.705 34.012,48.803 R35.1
NetL12_1: L12.1 R30.2 R37.1 | length 7.6
  TopLayer w0.508: R30.2 32.544,40.584 L12.1 32.995,40.635 34.075,41.715 R37.1
NetL13_1: L13.1 R31.2 R39.1 | length 7.7
  TopLayer w0.508: R31.2 28.505,29.437 32.631,29.437 L13.1 33.107,29.361 34.27,30.523 R39.1
NetL14_1: L14.1 R32.2 R41.1 | length 7.4
  TopLayer w0.508: R32.2 L14.1 33.453,21.182 34.253,21.982 35.533,21.982 R41.1
P13V0_SCSI: J20.25

## Polygon pours and split planes (outlines as drawn)
GND on BottomLayer "L3-No Net" (solid, remove dead copper, pour order 66): 0,-0.036 0,99.964 54.809,99.964 54.809,-0.036
GND on Signal Layer 1 "L3-No Net" (solid, remove dead copper, pour order 64): 0,-0.036 0,99.964 54.809,99.964 54.809,-0.036
GND on TopLayer "L3-No Net" (solid, remove dead copper, pour order 68): 0,-0.036 0,99.964 54.809,99.964 54.809,-0.036
no net on Internal Plane 2 (split plane): 54.299,0.51 0.51,0.51 0.51,18.464 0.501,18.564 0.472,18.66 0.424,18.748 0.361,18.825 -0.49,19.676 -0.49,26.553 0.266,27.308 0.329,27.386 0.377,27.474 0.406,27.57 0.415,27.669 0.415,39.829 0.406,39.929 0.377,40.024 0.329,40.113 0.266,40.19 -0.49,40.946 -0.49,47.753 0.361,48.603 0.424,48.681 0.472,48.769 0.501,48.865 0.51,48.964 0.51,62.364 0.501,62.464 0.472,62.56 0.424,62.648 0.361,62.725 -0.49,63.576 -0.49,70.253 0.361,71.103 0.424,71.181 0.472,71.269 0.501,71.365 0.51,71.464 0.51,82.989 0.501,83.089 0.472,83.185 0.424,83.273 0.361,83.35 -0.49,84.201 -0.49,90.753 0.361,91.603 0.424,91.681 0.472,91.769 0.501,91.865 0.51,91.964 0.51,99.489 54.299,99.489

## Keep-outs
TopLayer:
  lines w0.1: 1.647,8.612 5.181,8.612 6.444,7.35 6.444,6.213 ; 1.647,91.539 5.03,91.539 6.397,92.907 6.397,93.259 ; 6.397,2.987 6.397,5.234 ; 6.397,94.632 6.397,96.967
BottomLayer:
  lines w0.1: 1.647,8.612 5.181,8.612 6.444,7.35 6.444,3.213 ; 1.647,91.539 5.03,91.539 6.397,92.907 6.397,96.967
KeepOutLayer:
  lines w0.203: 4.756,97.009 7.397,97.009 7.391,97.003 50.809,97.003 50.809,3.023 5.492,3.023 ; 6.096,8.067 0,8.067 0,91.887 6.096,91.887

## Silkscreen, mask and mechanical layers (free items; w line width, h text height)
TopOverlay:
  circle w0.254: c3.556,5.476 r2.857
  circle w0.254: c3.556,94.376 r2.857
  circle w0.254: c3.556,5.476 r2.857
  circle w0.254: c3.556,94.376 r2.857
  lines w0.1: -12.641,1.073 -12.641,88.305
  text "IO0" at 10.668,89.464 h1.27
  text "IO1" at 6.858,78.958 h1.27
  text "IO2" at 10.668,68.798 h1.27
  text "IO3" at 5.334,58.13 h1.27
  text "IO4" at 10.668,45.964 h1.27
  text "IO5" at 5.588,35.524 h1.27
  text "IO6" at 10.668,25.364 h1.27
  text "IO7" at 7.497,11.009 h1.27
  text "BOT OUT" at 6.756,2.428 h1.02
  text "IDC to SMA Adapter v1.0.1" at 16.154,1.067 h1.52
  text "TOP IN" at 6.883,0.777 h1.02
Mechanical1:
  lines w0.1: 0,-0.036 0,18.464 -1,19.464 -1,26.764 -0.095,27.669 -0.095,39.829 -1,40.734 -1,47.964 0,48.964 0,62.364 -1,63.364 -1,70.464 0,71.464 0,82.989 -1,83.989 -1,90.964 0,91.964 0,99.964 ; 0,0 54.809,0 54.809,42 54.809,52 54.809,100 0,100
Mechanical4:
  lines w0.05: -2.544,-14.274 -2.544,103.258
Mechanical13:
  lines w0.152: -5.044,-14.274 -5.044,118.339 ; -2.544,-14.274 -2.544,116.292

## Text inside footprints (layer, text, board x,y; h text height)
J20: TopOverlay "26" at 44.23,61.4 h1.02 r90; Mechanical14 "26" at 44.23,61.4 h1.02 r90